# EAGLE board schematic_K3_Tuner.job (EAGLE 6.5.0)
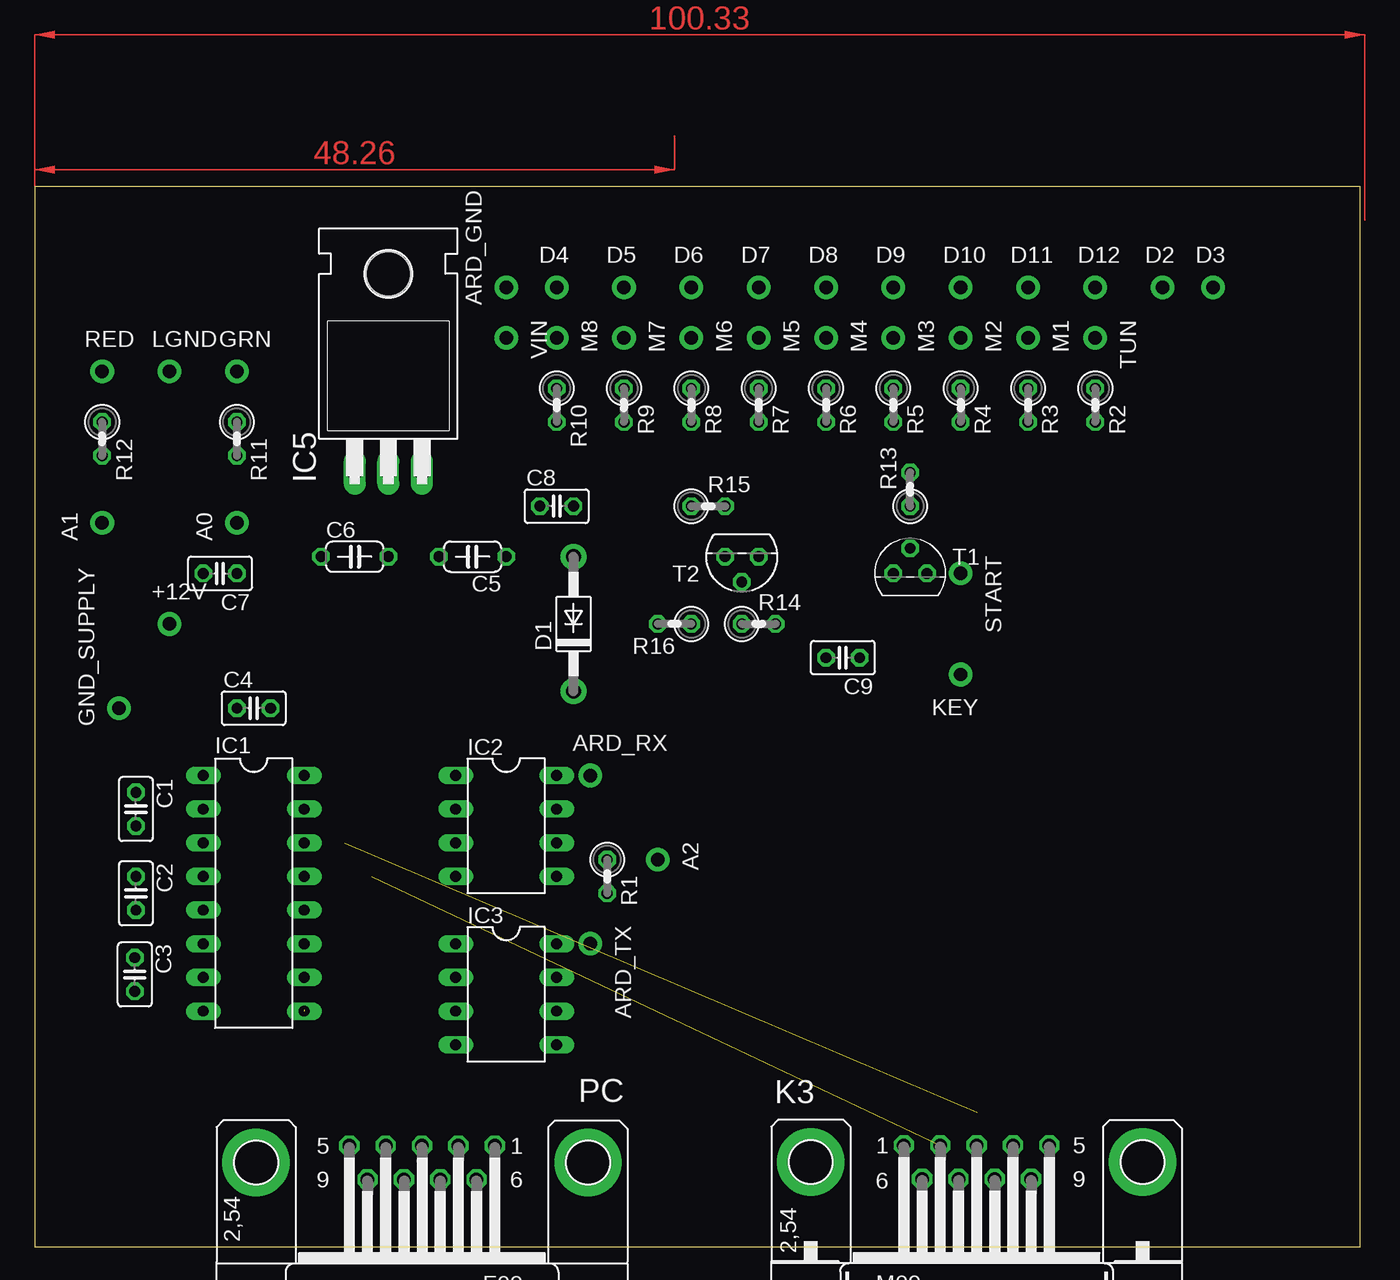
[diagram p0: board, top side]
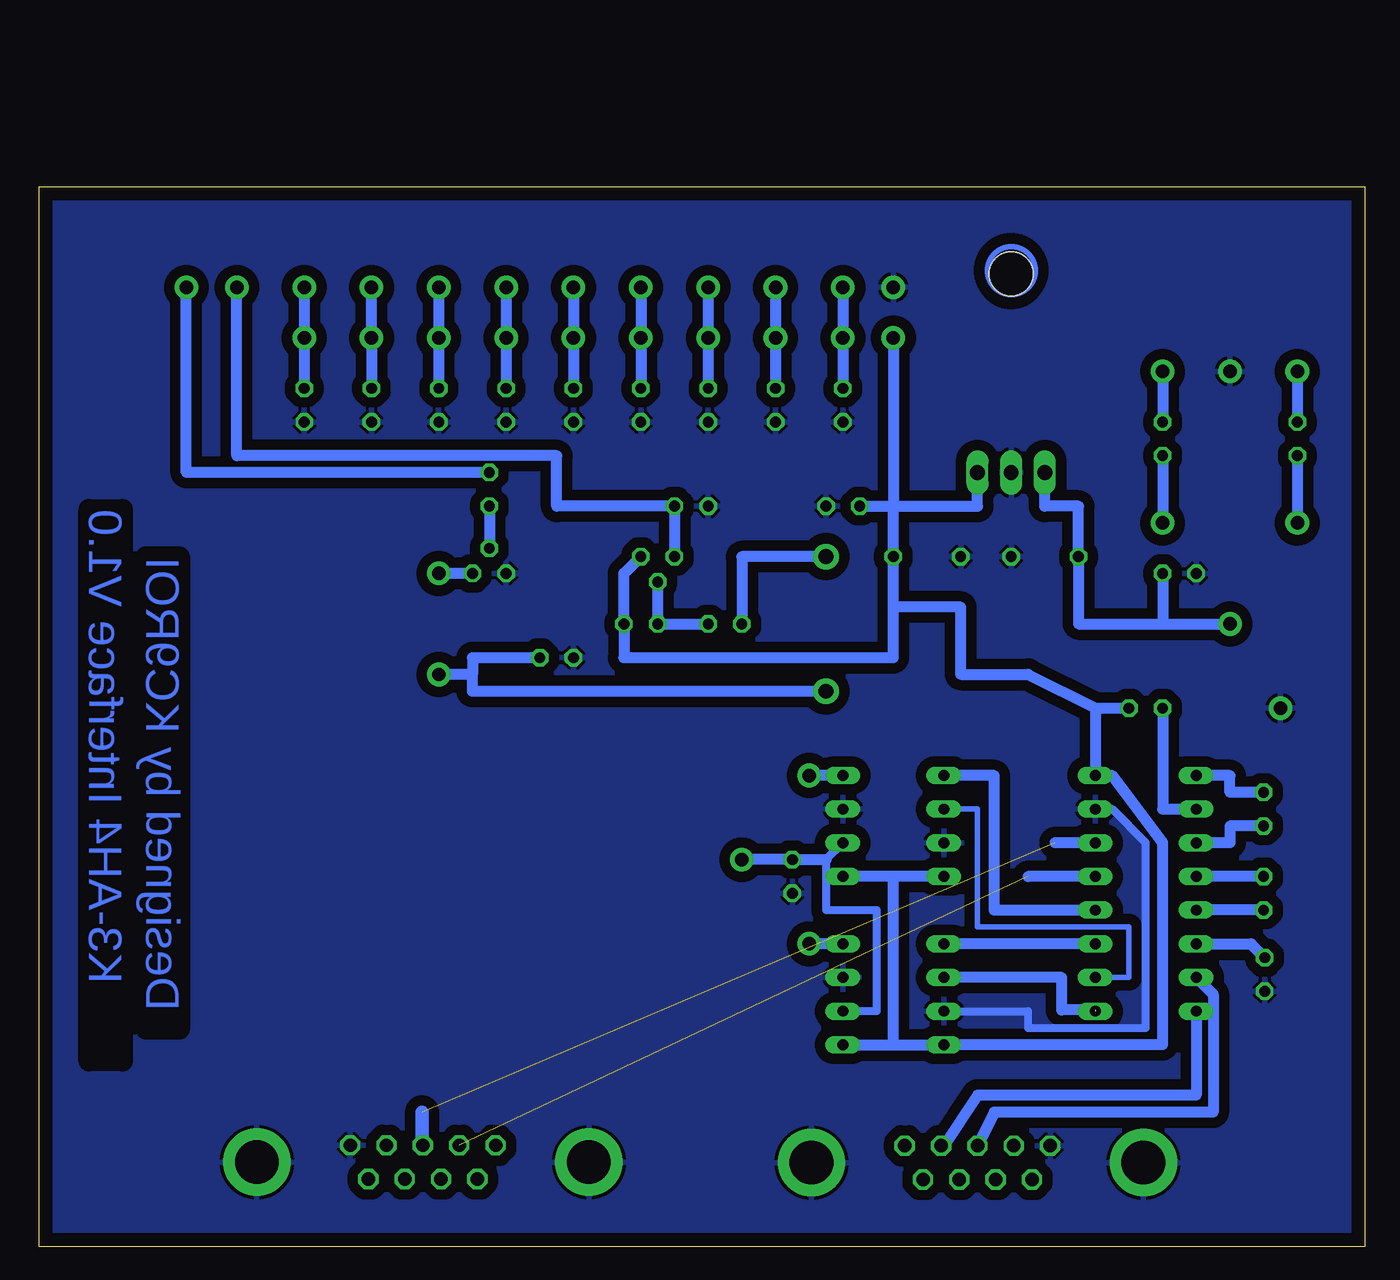
[diagram p1: board, bottom side, seen from below]

Size 100 x 80 mm. Coordinates in mm from the lower left corner, seen from the top.
Outline: 0,0 100,0 100,80 0,80 0,0
Copper layers (1*16): Top 0.035mm / dielectric 1.5mm / Bottom 0.035mm
Design rules "default *": minimum track width 1mm, minimum drill 1mm, track to track 0.8mm, track to pad 0.8mm, pad to pad 0.8mm, via to via 8mil, smd to smd 8mil, copper to edge 40mil, drill to drill 8mil, minimum pad ring 10mil, minimum via ring 8mil, stop-mask expansion 4mil, vias tented up to drill 0mil, thermal gap 10mil

## Footprints (pad centres in the part's own frame; a part is rotated, then mirrored left to right if it is on the bottom)
1X01-CLEANBIG = drill 1.016 pad 1.778: 1 0,0
C025-025X050 = drill 0.813 octagon: 1 -1.27,0; 2 1.27,0
C050-024X044 = drill 0.813 octagon: 1 -2.54,0; 2 2.54,0
DO41-10 = drill 1.118 pad 1.93: A 5.08,0; C -5.08,0
DIL16 = drill 0.813 long: 1 -8.89,-3.81; 2 -6.35,-3.81; 3 -3.81,-3.81; 4 -1.27,-3.81; 5 1.27,-3.81; 6 3.81,-3.81; 7 6.35,-3.81; 8 8.89,-3.81; 9 8.89,3.81; 10 6.35,3.81; 11 3.81,3.81; 12 1.27,3.81; 13 -1.27,3.81; 14 -3.81,3.81; 15 -6.35,3.81; 16 -8.89,3.81
DIL08 = drill 0.813 long: 1 -3.81,-3.81; 2 -1.27,-3.81; 3 1.27,-3.81; 4 3.81,-3.81; 5 3.81,3.81; 6 1.27,3.81; 7 -1.27,3.81; 8 -3.81,3.81
TO220H = drill 1.118 long: 1 -2.54,-10.16; 2 0,-10.16; 3 2.54,-10.16 | hole 3.302: 0,4.826
M09HP = drill 1.016 octagon: 1 -5.486,1.27; 2 -2.743,1.27; 3 0,1.27; 4 2.743,1.27; 5 5.486,1.27; 6 -4.115,-1.27; 7 -1.372,-1.27; 8 1.372,-1.27; 9 4.115,-1.27 | drill 3.302 pad 5.08: G1 -12.522,0; G2 12.522,0
F09HP = drill 1.016 octagon: 1 -5.486,-1.27; 2 -2.743,-1.27; 3 0,-1.27; 4 2.743,-1.27; 5 5.486,-1.27; 6 -4.115,1.27; 7 -1.372,1.27; 8 1.372,1.27; 9 4.115,1.27 | drill 3.302 pad 5.08: G1 -12.522,0; G2 12.522,0
0207/2V = drill 0.813 octagon: 1 -1.27,0; 2 1.27,0
TO92 = drill 0.813 octagon: 1 1.27,0; 2 0,1.905; 3 -1.27,0

## Placement (x,y rotation side)
+12V  [1X01-CLEANBIG]  10.16,46.99 0 top
A0  [1X01-CLEANBIG]  15.24,54.61 90 top
A1  [1X01-CLEANBIG]  5.08,54.61 90 top
A2  [1X01-CLEANBIG]  46.99,29.21 270 top
ARD_GND  [1X01-CLEANBIG]  35.56,72.39 90 top
ARD_RX  [1X01-CLEANBIG]  41.91,35.56 0 top
ARD_TX  [1X01-CLEANBIG]  41.91,22.86 270 top
C1  1uf  [C025-025X050]  7.62,33.02 270 top
C2  1uf  [C025-025X050]  7.62,26.67 270 top
C3  1uf  [C025-025X050]  7.54,20.54 270 top
C4  1uf  [C025-025X050]  16.51,40.64 0 top
C5  10uf  [C050-024X044]  33.02,52.07 180 top
C6  10uf  [C050-024X044]  24.13,52.07 0 top
C7  0.003uf  [C025-025X050]  13.97,50.8 180 top
C8  0.003uf  [C025-025X050]  39.37,55.88 0 top
C9  0.003uf  [C025-025X050]  60.96,44.45 180 top
D1  1N4004  [DO41-10]  40.64,46.99 90 top
D2  [1X01-CLEANBIG]  85.09,72.39 0 top
D3  [1X01-CLEANBIG]  88.9,72.39 0 top
D4  [1X01-CLEANBIG]  39.37,72.39 0 top
D5  [1X01-CLEANBIG]  44.45,72.39 0 top
D6  [1X01-CLEANBIG]  49.53,72.39 0 top
D7  [1X01-CLEANBIG]  54.61,72.39 0 top
D8  [1X01-CLEANBIG]  59.69,72.39 0 top
D9  [1X01-CLEANBIG]  64.77,72.39 0 top
D10  [1X01-CLEANBIG]  69.85,72.39 0 top
D11  [1X01-CLEANBIG]  74.93,72.39 0 top
D12  [1X01-CLEANBIG]  80.01,72.39 0 top
GND_SUPPLY  [1X01-CLEANBIG]  6.35,40.64 90 top
GRN  [1X01-CLEANBIG]  15.24,66.04 0 top
IC1  MAX232  [DIL16]  16.51,26.67 270 top
IC2  ADG419  [DIL08]  35.56,31.75 270 top
IC3  ADG419  [DIL08]  35.56,19.05 270 top
IC5  7805T  [TO220H]  26.67,68.58 0 top
K3  [M09HP]  71.05,6.39 0 top
KEY  [1X01-CLEANBIG]  69.85,43.18 180 top
LGND  [1X01-CLEANBIG]  10.16,66.04 0 top
M1  [1X01-CLEANBIG]  74.93,68.58 270 top
M2  [1X01-CLEANBIG]  69.85,68.58 270 top
M3  [1X01-CLEANBIG]  64.77,68.58 270 top
M4  [1X01-CLEANBIG]  59.69,68.58 270 top
M5  [1X01-CLEANBIG]  54.61,68.58 270 top
M6  [1X01-CLEANBIG]  49.53,68.58 270 top
M7  [1X01-CLEANBIG]  44.45,68.58 270 top
M8  [1X01-CLEANBIG]  39.37,68.58 270 top
PC  [F09HP]  29.21,6.35 180 top
R1  10k  [0207/2V]  43.18,27.94 270 top
R2  10k  [0207/2V]  80.01,63.5 270 top
R3  10k  [0207/2V]  74.93,63.5 270 top
R4  10k  [0207/2V]  69.85,63.5 270 top
R5  10k  [0207/2V]  64.77,63.5 270 top
R6  10k  [0207/2V]  59.69,63.5 270 top
R7  10k  [0207/2V]  54.61,63.5 270 top
R8  10k  [0207/2V]  49.53,63.5 270 top
R9  10k  [0207/2V]  44.45,63.5 270 top
R10  10k  [0207/2V]  39.37,63.5 270 top
R11  10k  [0207/2V]  15.24,60.96 270 top
R12  10k  [0207/2V]  5.08,60.96 270 top
R13  1k  [0207/2V]  66.04,57.15 90 top
R14  100k  [0207/2V]  54.61,46.99 0 top
R15  4.7k  [0207/2V]  50.8,55.88 0 top
R16  4.7k  [0207/2V]  48.26,46.99 180 top
RED  [1X01-CLEANBIG]  5.08,66.04 0 top
START  [1X01-CLEANBIG]  69.85,50.8 270 top
T1  2N3904  [TO92]  66.04,50.8 0 top
T2  2N3906  [TO92]  53.34,52.07 180 top
TUN  [1X01-CLEANBIG]  80.01,68.58 270 top
VIN  [1X01-CLEANBIG]  35.56,68.58 270 top

## Library data of the parts
+12V A0 A1 A2 ARD_GND ARD_RX ARD_TX D1-D12 GND_SUPPLY GRN KEY LGND M1-M8 RED START TUN VIN = adafruit
C1-C4 C7-C9 = rcl
C5 C6 R1-R16 = resistor
IC1 = maxim; MF: MAXIM; MPN: MAX232ACPE+; OC_FARNELL: 9723773; OC_NEWARK: 68K4544
IC2 IC3 = analog-devices; MF: ALTERA CORPORATION; MPN: ADG419BN; OC_FARNELL: 1438705; OC_NEWARK: 16F6524
IC5 = linear
K3 PC = con-subd; OC_FARNELL: unknown; OC_NEWARK: unknown
T1 = transistor-npn
T2 = transistor-pnp

## Nets
+5V: C4.2 C5.1 C8.1 IC1.16 IC2.4 IC2.5 IC3.4 IC3.5 IC5.3 R14.2 T2.3 VIN.1
+12V: +12V.1 C6.1 C7.1 IC5.1
ARDUINO_RX: ARD_RX.1 IC2.8
ARDUINO_TX: ARD_TX.1 IC3.8
GND: ARD_GND.1 C3.2 C5.2 C6.2 C7.2 C8.2 C9.2 GND_SUPPLY.1 IC1.15 IC2.3 IC2.7 IC3.3 IC3.7 IC5.2 K3.5 K3.G1 K3.G2 LGND.1 PC.5 PC.G1 PC.G2 R1.2 R2.2 R3.2 R4.2 R5.2 R6.2 R7.2 R8.2 R9.2 R10.2 R15.1 T1.3
K3RX: IC1.14 K3.3
K3TX: IC1.13 K3.2
MACRO1: D11.1 M1.1 R3.1
MACRO2: D10.1 M2.1 R4.1
MACRO3: D9.1 M3.1 R5.1
MACRO4: D8.1 M4.1 R6.1
MACRO5: D7.1 M5.1 R7.1
MACRO6: D6.1 M6.1 R8.1
MACRO7: D5.1 M7.1 R9.1
MACRO8: D4.1 M8.1 R10.1
N$1: R12.1 RED.1
N$2: GRN.1 R11.1
N$3: C2.2 IC1.5
N$4: C2.1 IC1.4
N$5: A1.1 R12.2
N$6: C1.2 IC1.3
N$7: C1.1 IC1.1
N$8: A0.1 R11.2
N$9: C3.1 IC1.6
N$10: IC1.10 IC2.2
N$11: R13.1 T1.2
N$12: IC1.12 IC2.1
N$13: IC1.11 IC3.1
N$15: START.1 T1.1
N$17: D3.1 R13.2
N$18: R14.1 R16.1 T2.2
N$19: C4.1 IC1.2
N$20: D2.1 R15.2 T2.1
N$22: D1.A R16.2
N$23: C9.1 D1.C KEY.1
PCRX: IC1.7 PC.3
PCTX: IC1.8 PC.2
SWITCH: A2.1 IC2.6 IC3.6 R1.1
T2IN: IC1.9 IC3.2
TUNE: D12.1 R2.1 TUN.1

## Tracks (layer width: path | path; a pad name or v marks a point on that pad's centre or on a via)
+5V
  Bottom 0.813: 35.56,55.88 C5.1 35.56,48.26 | 35.56,55.88 29.21,55.88 IC5.3 | VIN.1 35.56,55.88 | 35.56,48.26 30.48,48.26 30.48,43.18 25.4,43.18 20.32,40.64 | T2.3 55.88,50.8 R14.2 55.88,44.45 35.56,44.45 35.56,48.26 | C8.1 35.56,55.88 | 20.32,40.64 C4.2 | 20.32,40.64 IC1.16 | 35.56,15.24 IC3.4 15.24,15.24 15.24,30.48 19.05,35.56 IC1.16 | IC1.16 20.07,35.56 20.07,35.31 | IC2.4 35.56,27.94 | 35.56,27.94 IC2.5 | IC3.5 35.56,15.24 | 35.56,15.24 35.56,27.94
+12V
  Bottom 0.813: IC5.1 24.13,55.88 21.59,55.88 C6.1 21.59,46.99 15.24,46.99 | 15.24,46.99 +12V.1 | C7.1 15.24,46.99
ARDUINO_RX
  Bottom 0.813: IC2.8 ARD_RX.1
ARDUINO_TX
  Bottom 0.813: IC3.8 ARD_TX.1
GND
  Bottom 0.61: IC3.3 25.4,17.78 25.4,16.51 16.51,16.51 16.51,30.48 19.05,33.02 IC1.15
  pour Bottom: 0,80.01 0,0 100.33,0 100.33,80.01
K3RX  (1 unrouted)
  Bottom 0.813: IC1.14 23.37,30.48
  Bottom 1: 71.12,10.16 71.12,7.62 K3.3
K3TX  (1 unrouted)
  Bottom 0.813: IC1.13 25.4,27.94
MACRO1
  Bottom 0.813: R3.1 M1.1 D11.1
MACRO2
  Bottom 0.813: D10.1 M2.1 R4.1
MACRO3
  Bottom 0.813: D9.1 M3.1 R5.1
MACRO4
  Bottom 0.813: D8.1 M4.1 R6.1
MACRO5
  Bottom 0.813: D7.1 M5.1 R7.1
MACRO6
  Bottom 0.813: D6.1 M6.1 R8.1
MACRO7
  Bottom 0.813: D5.1 M7.1 R9.1
MACRO8
  Bottom 0.813: D4.1 M8.1 R10.1
N$1
  Bottom 0.813: RED.1 R12.1
N$2
  Bottom 0.813: GRN.1 R11.1
N$3
  Bottom 0.813: C2.2 IC1.5
N$4
  Bottom 0.813: C2.1 IC1.4
N$5
  Bottom 0.813: R12.2 A1.1
N$6
  Bottom 0.813: C1.2 10.16,31.75 10.16,30.48 IC1.3
N$7
  Bottom 0.813: C1.1 10.16,34.29 10.16,35.56 IC1.1
N$8
  Bottom 0.813: R11.2 A0.1
N$9
  Bottom 0.813: IC1.6 8.58,22.86 C3.1
N$10
  Bottom 0.406: IC1.10 17.78,20.32 17.78,24.13 29.21,24.13 29.21,33.02 IC2.2
N$11
  Bottom 0.813: R13.1 T1.2
N$12
  Bottom 0.813: IC1.12 27.94,25.4 27.94,35.56 IC2.1
N$13
  Bottom 0.813: IC1.11 IC3.1
N$15
  Bottom 0.813: T1.1 START.1
N$17
  Bottom 0.813: R13.2 88.9,58.42 D3.1
N$18
  Bottom 0.813: T2.2 R14.1 R16.1
N$19
  Bottom 0.813: IC1.2 15.24,33.02 C4.1
N$20
  Bottom 0.813: T2.1 R15.2 60.96,55.88 60.96,59.69 85.09,59.69 D2.1
N$22
  Bottom 0.813: D1.A 46.99,52.07 R16.2
N$23
  Bottom 0.813: D1.C 67.31,41.91 67.31,43.18 | C9.1 67.31,44.45 67.31,43.18 | 67.31,43.18 KEY.1
PCRX
  Bottom 0.813: IC1.7 11.43,19.05 11.43,10.16 27.94,10.16 PC.3
PCTX
  Bottom 0.813: IC1.8 12.7,11.43 29.21,11.43 31.75,7.62 PC.2
SWITCH
  Bottom 0.61: IC2.6 40.64,29.21 40.64,25.4 36.83,25.4 36.83,17.78 IC3.6
  Bottom 0.813: 40.64,29.21 R1.1 A2.1
T2IN  (1 unrouted)
  Bottom 0.813: 20.32,17.88 22.86,17.88 22.86,20.32 IC3.2
TUNE
  Bottom 0.813: D12.1 TUN.1 R2.1
(copper drawn outside any net)
  shapes: Bottom circle x1, Top area x2

## Text on the board
Bottom: K3-AH4 Interface V1.0 | Designed by KC9ROI